# EAGLE board schematic (EAGLE 8.1.0)

Size 50.47 x 50.79 mm. Coordinates in mm from the lower left corner, seen from the top.
Outline: 0,0 50.47,0 50.47,50.79 0,50.79 0,0
Copper layers (1*16): Top 0.035mm / dielectric 1.5mm / Bottom 0.035mm
Design rules "default": minimum track width 10mil, minimum drill 24mil, track to track 8mil, track to pad 8mil, pad to pad 8mil, via to via 8mil, smd to smd 8mil, copper to edge 40mil, drill to drill 8mil, minimum pad ring 10mil, minimum via ring 8mil, stop-mask expansion 4mil, vias tented up to drill 0mil, thermal gap 10mil

## Footprints (pad centres in the part's own frame; a part is rotated, then mirrored left to right if it is on the bottom)
C0504 = smd 1 x 1.3: 1 -0.7,0; 2 0.7,0
SSOP16 = smd 0.35 x 1.55: 1 -2.223,-2.7; 2 -1.587,-2.7; 3 -0.953,-2.7; 4 -0.318,-2.7; 5 0.318,-2.7; 6 0.953,-2.7; 7 1.587,-2.7; 8 2.223,-2.7; 9 2.223,2.7; 10 1.587,2.7; 11 0.953,2.7; 12 0.318,2.7; 13 -0.318,2.7; 14 -0.953,2.7; 15 -1.587,2.7; 16 -2.223,2.7
TQFP32-08 = smd 1.27 x 0.508: 1 -4.293,2.8; 2 -4.293,2; 3 -4.293,1.2; 4 -4.293,0.4; 5 -4.293,-0.4; 6 -4.293,-1.2; 7 -4.293,-2; 8 -4.293,-2.8; 17 4.293,-2.8; 18 4.293,-2; 19 4.293,-1.2; 20 4.293,-0.4; 21 4.293,0.4; 22 4.293,1.2; 23 4.293,2; 24 4.293,2.8 | smd 0.508 x 1.27: 9 -2.8,-4.293; 10 -2,-4.293; 11 -1.2,-4.293; 12 -0.4,-4.293; 13 0.4,-4.293; 14 1.2,-4.293; 15 2,-4.293; 16 2.8,-4.293; 25 2.8,4.293; 26 2,4.293; 27 1.2,4.293; 28 0.4,4.293; 29 -0.4,4.293; 30 -1.2,4.293; 31 -2,4.293; 32 -2.8,4.293
SO08 = smd 0.6 x 2.2: 1 -1.905,-2.6; 2 -0.635,-2.6; 3 0.635,-2.6; 4 1.905,-2.6; 5 1.905,2.6; 6 0.635,2.6; 7 -0.635,2.6; 8 -1.905,2.6
1X06-BIG = drill 1.016 pad 1.778 octagon: 1 -6.35,0; 2 -3.81,0; 3 -1.27,0; 4 1.27,0; 5 3.81,0; 6 6.35,0
0402 = smd 0.7 x 0.9: 1 -0.65,0; 2 0.65,0
R0603 = smd 1 x 1.1: 1 -0.85,0; 2 0.85,0
B3F-10XX = drill 1.016 long: 1 -3.251,2.261; 2 3.251,2.261; 3 -3.251,-2.261; 4 3.251,-2.261
FE05-1 = drill 0.813 long: 1 -5.08,0; 2 -2.54,0; 3 0,0; 4 2.54,0; 5 5.08,0
SOT95P270X145-5N = smd 1.321 x 0.559: 1 -1.372,0.94; 2 -1.372,0; 3 -1.372,-0.94; 4 1.372,-0.94; 5 1.372,0.94
RN4020SMD = smd 1.5 x 0.8: P01 0.25,10.9; P02 0.25,9.7; P03 0.25,8.5; P04 0.25,7.3; P05 0.25,6.1; P06 0.25,4.9; P07 0.25,3.7; P08 0.25,2.5; P17 11.25,2.5; P18 11.25,3.7; P19 11.25,4.9; P20 11.25,6.1; P21 11.25,7.3; P22 11.25,8.5; P23 11.25,9.7; P24 11.25,10.9 | smd 0.8 x 1.5: P10 2.75,0.25; P11 3.95,0.25; P12 5.15,0.25; P13 6.35,0.25; P14 7.55,0.25; P15 8.75,0.25
1X30-0.7MM = smd 0.35 x 1.6: 1 -10.15,0; 2 -9.45,0; 3 -8.75,0; 4 -8.05,0; 5 -7.35,0; 6 -6.65,0; 7 -5.95,0; 8 -5.25,0; 9 -4.55,0; 10 -3.85,0; 11 -3.15,0; 12 -2.45,0; 13 -1.75,0; 14 -1.05,0; 15 -0.35,0; 16 0.35,0; 17 1.05,0; 18 1.75,0; 19 2.45,0; 20 3.15,0; 21 3.85,0; 22 4.55,0; 23 5.25,0; 24 5.95,0; 25 6.65,0; 26 7.35,0; 27 8.05,0; 28 8.75,0; 29 9.45,0; 30 10.15,0
32005-301 = smd 3.1 x 0.5: 1 3,1.6; 2 3,0.8; 3 3,0; 4 3,-0.8; 5 3,-1.6 | smd 2.5 x 2: M1 -3,-4.45; M2 -3,4.45 | smd 3.3 x 2: M3 2.9,4.45; M4 2.9,-4.45 | hole 0.9: 0,2.2; 0,-2.2

## Placement (x,y rotation side)
C1  1uF  [C0504]  44.45,26.67 0 top
C2  1uF  [C0504]  45.72,11.43 0 top
C3  1uF  [C0504]  12.06,20.32 0 top
C4  2.2uF  [C0504]  12.7,23.5 0 top
C5  47pF  [C0504]  17.14,13.34 0 top
C6  47pF  [C0504]  24.77,13.97 0 top
C7  10nF  [C0504]  31.75,19.05 0 top
C8  4.7uF  [C0504]  24.77,27.94 0 top
C9  100nF  [C0504]  27.94,36.2 0 top
C10  100nF  [C0504]  64.77,16.51 0 top  (outside the outline)
C11  .1uf  [C0504]  -0.64,-18.41 0 top  (outside the outline)
C12  1uF  [C0504]  -0.64,-24.77 0 top  (outside the outline)
C13  1uF  [C0504]  -0.64,-31.11 0 top  (outside the outline)
C14  2.2uF  [C0504]  -0.64,-37.47 0 top  (outside the outline)
C15  2.2uF  [C0504]  -0.64,-43.81 0 top  (outside the outline)
C16  .1uF  [C0504]  -0.64,-50.16 0 top  (outside the outline)
C17  1uF  [C0504]  -0.64,-61.59 0 top  (outside the outline)
C18  1uF  [C0504]  -0.64,-99.06 0 top  (outside the outline)
IC1  FT230XS  [SSOP16]  17.78,21.59 90 top
IC3  ATMEGA32U2-TQFP  [TQFP32-08]  3.81,-71.12 0 top  (outside the outline)
IC4  L4931D  [SO08]  5.08,5.08 90 top
JP1  [1X06-BIG]  12.7,-87 0 top  (outside the outline)
L1  BLM15HB221SN1  [0402]  10.16,26.04 0 top
R1  2K  [R0603]  38.1,20.32 0 top
R2  10K  [R0603]  35.56,24.13 0 top
R3  10K  [R0603]  48.26,20.32 0 top
R4  10K  [R0603]  38.1,39.37 0 top
R5  [R0603]  19.68,26.67 0 top
R6  27  [R0603]  12.7,13.97 0 top
R7  27  [R0603]  29.84,12.7 0 top
R8  10K  [R0603]  29.84,24.77 0 top
R9  10K  [R0603]  24.13,20.95 0 top
R10  10K  [R0603]  24.13,19.05 0 top
R11  10K  [R0603]  24.13,22.86 0 top
R12  2K  [R0603]  -0.64,-7.62 0 top  (outside the outline)
R13  2K  [R0603]  -0.64,-12.7 0 top  (outside the outline)
R14  390K  [R0603]  -0.64,-55.88 0 top  (outside the outline)
R15  22  [R0603]  -0.64,-104.78 0 top  (outside the outline)
R16  22  [R0603]  -0.64,-109.86 0 top  (outside the outline)
S1  [B3F-10XX]  15.24,5.08 0 top
S4  [B3F-10XX]  26.67,5.08 0 top
S5  [B3F-10XX]  39.37,5.08 0 top
SV1  [FE05-1]  11.43,36.83 0 top
U$1  MCP73812T-420I/OT  [SOT95P270X145-5N]  46.99,33.02 0 top
U$2  RN4020  [RN4020SMD]  6.35,33.02 0 top
U$3  UG-2864HSWEG01  [1X30-0.7MM]  25.4,12.06 0 bottom
X1  MINI-USB-32005-301  [32005-301]  4.45,21.59 0 top

## Library data of the parts
C1-C18 = eagle-ltspice; SPICEMODEL: NONE; SPICEPREFIX: C
IC1 = ft230x_10; MF: FTDI; MPN: FT230XS; OC_FARNELL: 2081321; OC_NEWARK: 83T7087
IC3 JP1 U$3 = adafruit
IC4 = v-reg-3
L1 = inductors
R1-R16 = eagle-ltspice; SPICEMODEL: NONE; SPICEPREFIX: R
S1 S4 S5 = switch-omron; MPN: B3F-1000; OC_FARNELL: 176432; OC_NEWARK: 36M3542
SV1 = con-lsta; OC_FARNELL: unknown; OC_NEWARK: unknown
U$1 = Microchip_By_element14_Batch_1; MPN: MCP73812T-420I/OT; OC_FARNELL: 1627187; OC_NEWARK: 27M0232; PACKAGE: SOT-5; SUPPLIER: Microchip
U$2 = microchip_bluetooth_v101
X1 = con-cypressindustries; OC_FARNELL: unknown; OC_NEWARK: unknown

## Nets
2: IC1.9 R6.1
3: IC1.8 R7.1
6: IC1.4 R9.2
B0: R2.2 S1.2
B1: R3.2 S4.2
B2: R4.2 S5.2
GND: C1.2 C2.2 C3.2 C4.2 C5.1 C6.2 C7.2 C8.2 C9.2 C10.2 C11.1 C12.1 C14.1 C15.1 C16.1 C18.1 IC1.5 IC1.13 IC3.3 IC4.2 IC4.5 JP1.6 R2.1 R3.1 R4.1 R14.2 SV1.3 U$3.1 U$3.8 U$3.15 U$3.17 U$3.29 U$3.30
N$1: R1.2 U$1.5
N$2: R1.1 U$1.2
N$3: IC3.15 JP1.2
N$4: IC3.16 JP1.3
N$5: C14.2 U$3.27
N$6: IC1.2 R10.2
N$7: C13.2 U$3.2
N$8: IC1.6 R11.2
N$9: R14.1 U$3.26
N$10: C13.1 U$3.3
N$11: C17.2 U$3.4
N$12: C17.1 U$3.5
N$13: IC3.17 JP1.4
N$14: C18.2 IC3.27
N$15: IC3.30 R15.1
N$16: IC3.29 R16.1
NET1: C10.1 IC1.3 IC1.10 IC1.11 R8.1 R9.1 R10.1 R11.1
OLED_SCL: R12.1 U$3.18
OLED_SDA: R13.1 U$3.19 U$3.20
OLED_VCC: C15.2 C16.2 U$3.28
OLED_VDD: R12.2 R13.2 U$3.11 U$3.14
OLED_VSS: U$3.10 U$3.12 U$3.13 U$3.16
RESET: IC3.24 JP1.5
SHEILD: X1.5
TXD: IC1.1 R8.2
UGND: IC3.28 X1.4
USB+: C6.1 R7.2 R16.2 X1.3
USB-: C5.2 R6.2 R15.2 X1.2
VBAT+: C2.1 C3.1 IC4.8 SV1.4 U$1.3
VCC: C4.1 C8.1 C9.1 C11.2 C12.2 IC1.12 IC3.4 IC4.1 JP1.1 L1.1 S1.3 S4.3 S5.3 U$3.6 U$3.9
VCHG: C7.1 L1.2 SV1.5
VUSB: C1.1 U$1.1 U$1.4 X1.1

## Tracks (layer width: path | path; a pad name or v marks a point on that pad's centre or on a via)
2  (1 unrouted)
3  (1 unrouted)
6  (1 unrouted)
B0  (1 unrouted)
B1  (1 unrouted)
B2  (1 unrouted)
GND  (32 unrouted)
N$1  (1 unrouted)
N$2  (1 unrouted)
N$3  (1 unrouted)
N$4  (1 unrouted)
N$5  (1 unrouted)
N$6  (1 unrouted)
N$7  (1 unrouted)
N$8  (1 unrouted)
N$9  (1 unrouted)
N$10  (1 unrouted)
N$11  (1 unrouted)
N$12  (1 unrouted)
N$13  (1 unrouted)
N$14  (1 unrouted)
N$15  (1 unrouted)
N$16  (1 unrouted)
NET1  (7 unrouted)
OLED_SCL  (1 unrouted)
OLED_SDA  (2 unrouted)
OLED_VCC  (2 unrouted)
OLED_VDD  (3 unrouted)
OLED_VSS  (3 unrouted)
RESET  (1 unrouted)
TXD  (1 unrouted)
UGND  (1 unrouted)
USB+  (3 unrouted)
USB-  (3 unrouted)
VBAT+  (4 unrouted)
VCC  (14 unrouted)
VCHG  (2 unrouted)
VUSB  (3 unrouted)